# Altium PCB coilcube_v3.PcbDoc
Units mil, origin at the board's own origin, x right, y up, seen from the top; angles counter-clockwise.
Board outline 2225 x 1000 mil, 2 copper layers (Top Layer, Bottom Layer); 69 components, 44 nets, 177 pads, 38 vias.
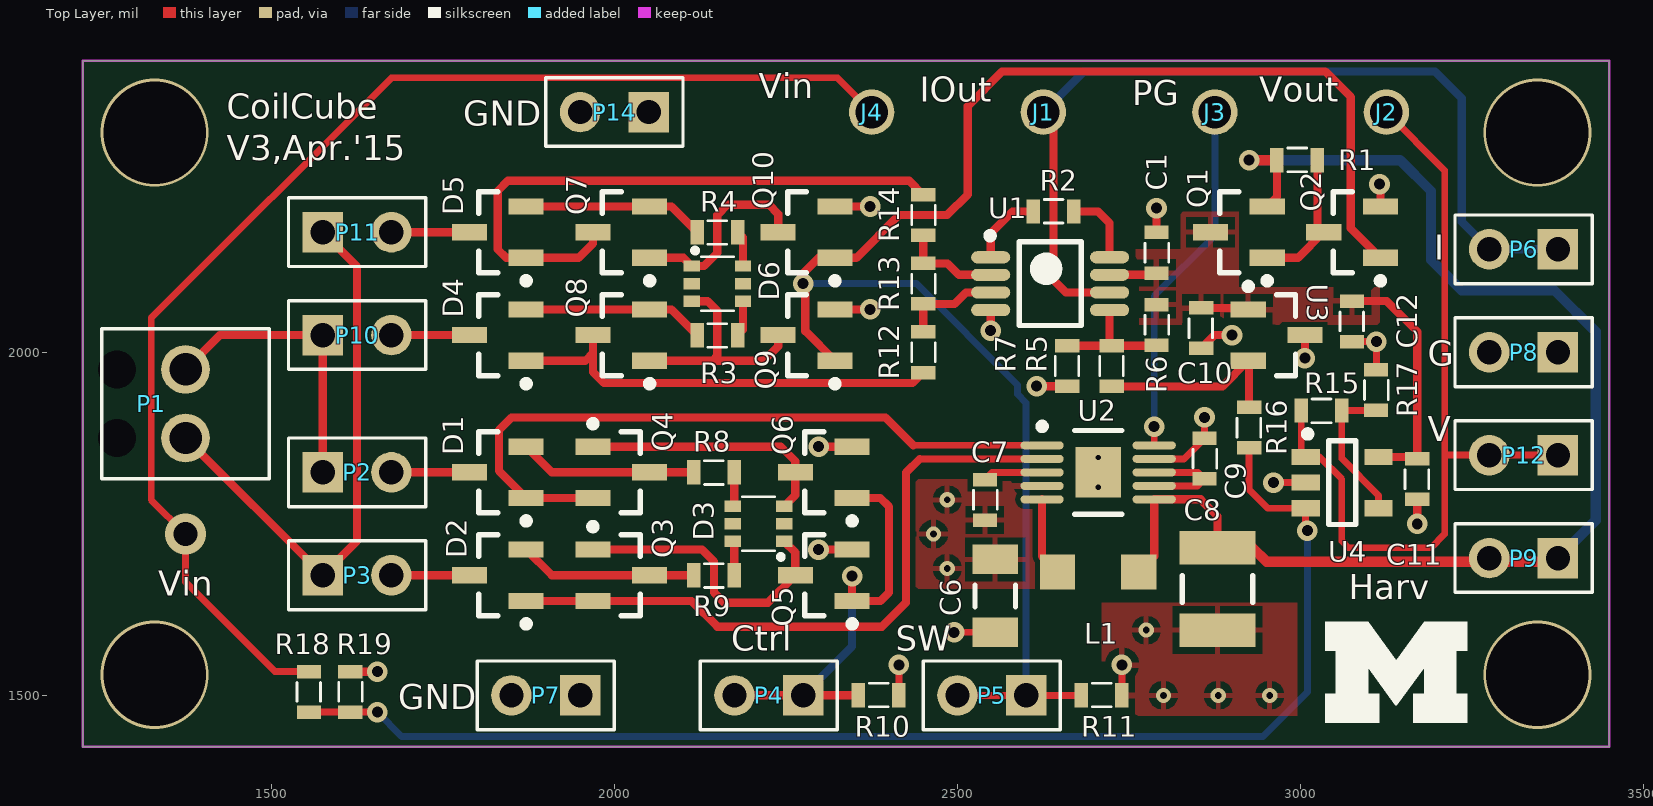
[diagram p0: Top Layer view]
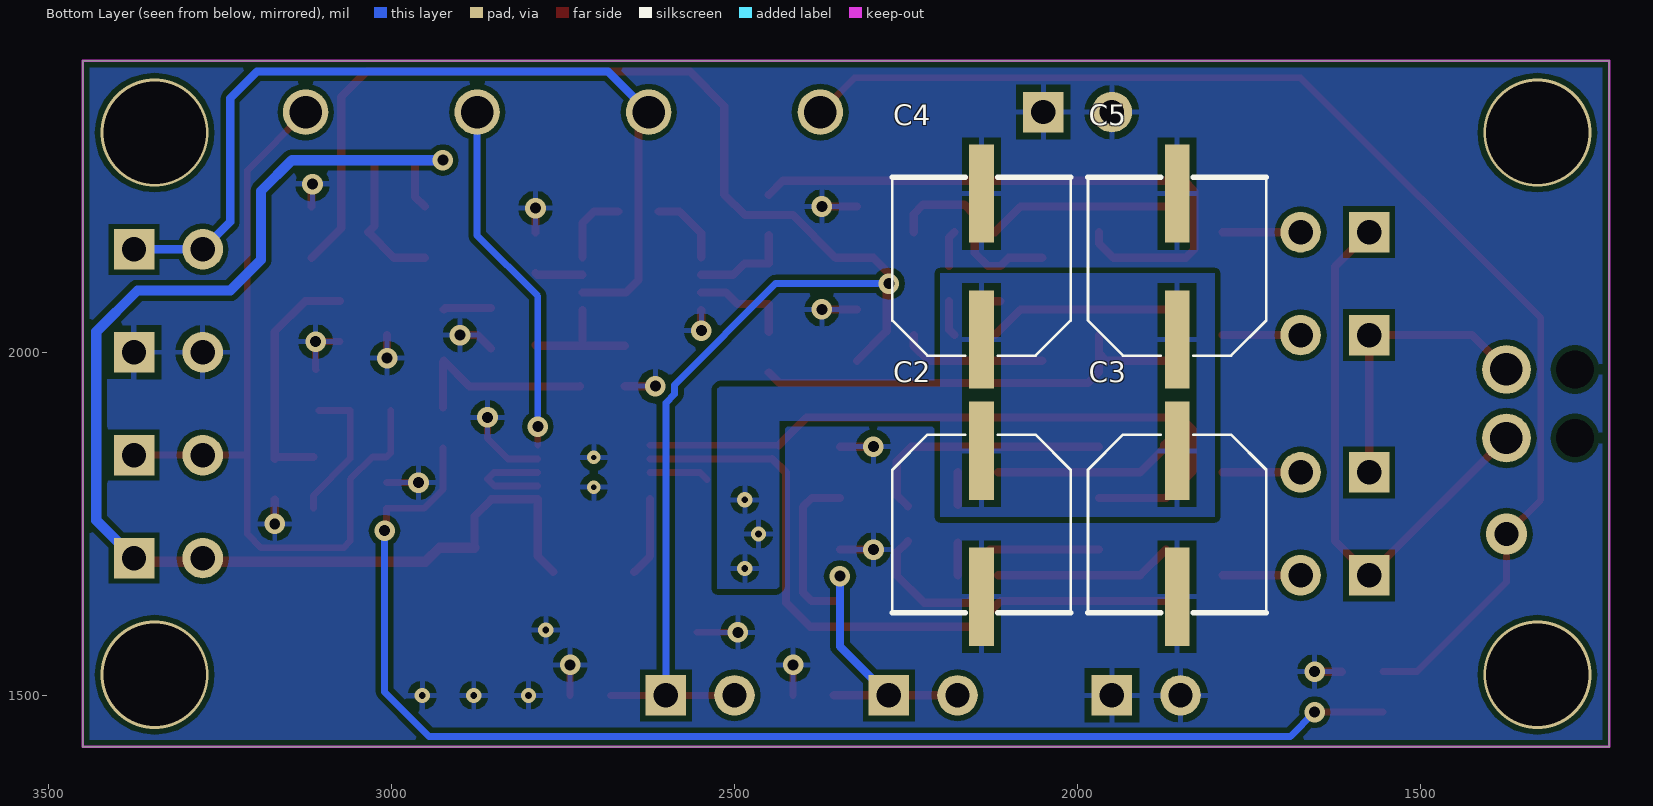
[diagram p1: Bottom Layer view, seen from below]

## Layer stack, top to bottom
Top Solder: solder mask 0.4, Solder Resist, Dk 3.5
Top Layer: signal copper 1.4
Dielectric 1: dielectric 12.6, FR-4, Dk 4.8
Bottom Layer: signal copper 1.4
Bottom Solder: solder mask 0.4, Solder Resist, Dk 3.5

## Board outline
1225,1425 3450,1425 3450,2425 1225,2425

## Design rules (kind name [scope] priority, off if disabled: settings)
Clearance "Clearance~Sunstone Circuits" [All] p1: gap=8 // Sunstone Circuits Minimum Clearance Rule (Double Sided)
HoleSize "HoleSize~Sunstone Circuits" [All] p1: absolutevalues=TRUE maxlimit=251 minlimit=16 maxpercent=80.000 minpercent=20.000 // SSC Hole Size Rule For Single Sided & Double Sided Designs.
HoleSize Testpoint [All] p2: absolutevalues=TRUE maxlimit=100 minlimit=1 maxpercent=80.000 minpercent=20.000
HoleSize TestPointUsage [All] p3: absolutevalues=TRUE maxlimit=100 minlimit=1 maxpercent=80.000 minpercent=20.000
MinimumAnnularRing "MinimumAnnularRing~Sunstone Circuits" [All] p1: minimumring=7 // Sunstone Circuits Minimum Annular Ring (Double Sided)
PlaneClearance "PlaneClearance~Sunstone Circuits" [All] p1: clearance=12 // Sunstone Circuits Power Plane Clearance Rule (Double Sided)
PlaneConnect "PlaneConnect~Sunstone Circuits" [All] p1: planeconnectstyle=Relief reliefexpansion=10 reliefentries=4 reliefconductorwidth=8 reliefairgap=10 // Sunstone Circuits Power Plane Connect Rule (Double Sided)
PolygonConnect "PolygonConnect~Sunstone Circuits" [All] p1: connectstyle=Relief reliefconductorwidth=8 reliefentries=4 polygonreliefangle="90 Angle" airgapwidth=10 // Sunstone Circuits Polygon Connect Style (Double Sided)
RoomDefinition voltage_measurment [InComponentClass('voltage_measurment')] p1 off: confinementstyle=ConfineIn formatcopy=TRUE lockcomponents=FALSE outline 2315.4,2290.1 2315.4,2409.9 3185,2409.9 3185,1912.5 3437.5,1912.5 3437.5,1787.5 3204.61,1787.5 3204.61,1758.74 3147.29,1758.74 3147.29,1728.15 2973.65,1728.15 2973.65,1833.74 2890.39,1833.74 2890.39,2290.1
RoomDefinition harvesting [InComponentClass('harvesting')] p2 off: confinementstyle=ConfineIn formatcopy=TRUE lockcomponents=FALSE outline 1237.44,1803.44 1237.44,2046.56 1711.14,2046.56 1711.14,2315.95 1887.5,2315.95 1887.5,2412.5 2112.5,2412.5 2112.5,2409.9 2935,2409.9 2935,2062.5 3437.5,2062.5 3437.5,1637.5 2954.94,1637.5 2954.94,1549.53 2441.26,1549.53 2441.26,1465.39 2337.5,1465.39 2337.5,1437.5 1787.5,1437.5 1787.5,1559.05 1711.14,1559.05 1711.14,1612.5 1512.5,1612.5 1512.5,1803.44
RoomDefinition current_measurment [InComponentClass('current_measurment')] p3 off: confinementstyle=ConfineIn formatcopy=TRUE lockcomponents=FALSE outline 1512.5,1962.5 1512.5,2237.5 1741.26,2237.5 1741.26,2255.87 2415.39,2255.87 2415.39,2256.26 2565.4,2256.26 2565.4,2409.9 2685,2409.9 2685,2314.61 3051.26,2314.61 3051.26,2255.87 3163.74,2255.87 3163.74,2212.5 3437.5,2212.5 3437.5,2087.5 3163.74,2087.5 3163.74,2084.29 3053.74,2084.29 3053.74,1944.13 2766.26,1944.13 2766.26,1465.39 2662.5,1465.39 2662.5,1437.5 2437.5,1437.5 2437.5,1934.29 1741.26,1934.29 1741.26,1962.5
RoutingVias "RoutingVias~Sunstone Circuits" [All] p1: holewidth=16 width=30 viastyle="Through Hole" minholewidth=16 minwidth=30 maxholewidth=20 maxwidth=40 // Sunstone Circuits Routing Vias Rule (Double Sided)
ShortCircuit "ShortCircuit~Sunstone Circuits" [All] p1: allowed=FALSE // Sunstone Circuits Short Circuit Rule~Do Not Allow (Double Sided)
SolderMaskExpansion TentVias [isVia] p1: expansion=-20 // Sunstone Circuits Solder Mask Expansion Rule (Double Sided)
SolderMaskExpansion "SolderMaskExpansion~Sunstone Circuits" [All] p2: expansion=3 // Sunstone Circuits Solder Mask Expansion Rule (Double Sided)
ViasUnderSMD "ViasUnderSMD~Sunstone Circuits" [All] p1: allowed=FALSE // Sunstone Circuits Vias Under SMD~Do Not Allow (Double Sided)
Width "Width~Sunstone Circuits" [All] p1: maxlimit=100 minlimit=6 preferedwidth=10 // Sunstone Circuits Minimum Width Rule (Double Sided)
26 further rules are at their usual default settings.

## Classes and differential pairs
component class voltage_measurment: C11 C12 J2 J4 P12 R15 R16 R17 R18 R19 U4
component class harvesting: C2 C3 C4 C5 C6 C7 C8 C9 D1 D2 D3 J3 L1 P1 P2 P3 P4 P7 P8 P9 P14 Q3 Q4 Q5 Q6 R8 R9 R10 U2
component class current_measurment: C1 C10 D4 D5 D6 J1 P5 P6 P10 P11 Q1 Q2 Q7 Q8 Q9 Q10 R1 R2 R3 R4 R5 R6 R7 R11 R12 R13 R14 U1 U3

## Components (designator, comment, footprint, x,y, rotation, side; value= is the part's Value field where it differs from the comment)
C1 "Ceramic capacitor" 0603 2790,2145 r90 top
C2 "Aluminum capacitor" KEMET_EDK_9H 2140,1750 r90 bottom
C3 "Aluminum capacitor" KEMET_EDK_9H 1855,1750 r90 bottom
C4 "Aluminum capacitor" KEMET_EDK_9H 2140,2125 r270 bottom
C5 "Aluminum capacitor" KEMET_EDK_9H 1855,2125 r270 bottom
C6 "Ceramic capacitor" 1206 2555,1645 r270 top
C7 "Ceramic capacitor" 0603 2540,1785 r90 top
C8 "Ceramic capacitor" 1210 2875,1655 r90 top
C9 "Ceramic capacitor" 0603 2860,1845 r90 top
C10 "Ceramic capacitor" 0603 2855,2035 r270 top
C11 "Ceramic capacitor" 0603 3170,1815 r270 top
C12 "Ceramic capacitor" 0603 3075,2045 r270 top
D1 "D_BAS40-04" SOT23-3 1830,1825 r180 top
D2 "D_BAS40-04" SOT23-3 1830,1675 r180 top
D3 "BAS40TW" SOT-363 2210,1750 r90 top
D4 "D_BAS40-04" SOT23-3 1830,2025 r180 top
D5 "D_BAS40-04" SOT23-3 1830,2175 r180 top
D6 "BAS40TW" SOT-363 2150,2100 r270 top
J1 "5004" TestPoint 2625,2350 r0 top
J2 "5004" TestPoint 3125,2350 r0 top
J3 "5004" TestPoint 2875,2350 r0 top
J4 "5004" TestPoint 2375,2350 r0 top
L1 "Chip inductor" CDRH2D18 2705,1680 r180 top
P1 "Screw connector" MPT_2position 1375,1925 r270 top
P2 "1 x 2 header" "1x2 header" 1625,1825 r0 top
P3 "1 x 2 header" "1x2 header" 1625,1675 r0 top
P4 "1 x 2 header" "1x2 header" 2225,1500 r180 top
P5 "1 x 2 header" "1x2 header" 2550,1500 r180 top
P6 "1 x 2 header" "1x2 header" 3325,2150 r180 top
P7 "1 x 2 header" "1x2 header" 1900,1500 r180 top
P8 "1 x 2 header" "1x2 header" 3325,2000 r180 top
P9 "1 x 2 header" "1x2 header" 3325,1700 r180 top
P10 "1 x 2 header" "1x2 header" 1625,2025 r0 top
P11 "1 x 2 header" "1x2 header" 1625,2175 r0 top
P12 "1 x 2 header" "1x2 header" 3325,1850 r180 top
P14 "1 x 2 header" "1x2 header" 2000,2350 r180 top
Q1 "Si2309CDS" SOT23-3 2910,2175 r180 top
Q2 "Si2312CDS" SOT23-3 3075,2175 r180 top
Q3 "Si2342DS" SOT23-3 2010,1675 r0 top
Q4 "Si2342DS" SOT23-3 2010,1825 r0 top
Q5 "Si2338DS" SOT23-3 2305,1675 r180 top
Q6 "Si2338DS" SOT23-3 2305,1825 r180 top
Q7 "Si2301CDS" SOT23-3 2010,2175 r180 top
Q8 "Si2301CDS" SOT23-3 2010,2025 r180 top
Q9 "Si2338DS" SOT23-3 2280,2025 r180 top
Q10 "Si2338DS" SOT23-3 2280,2175 r180 top
R1 "Chip resistor" 0603 2995,2280 r180 top
R2 "Chip resistor" 0603 2640,2205 r180 top
R3 "Chip resistor" 0603 2150,2025 r0 top
R4 "Chip resistor" 0603 2150,2175 r0 top
R5 "Chip resistor" 0603 2725,1980 r270 top
R6 "Chip resistor" 0603 2790,2040 r90 top
R7 "Chip resistor" 0603 2660,1980 r270 top
R8 "Chip resistor" 0603 2145,1825 r0 top
R9 "Chip resistor" 0603 2145,1675 r0 top
R10 "Chip resistor" 0603 2385,1500 r180 top
R11 "Chip resistor" 0603 2710,1500 r180 top
R12 "Chip resistor" 0603 2450,2000 r90 top
R13 "Chip resistor" 0603 2450,2100 r90 top
R14 "Chip resistor" 0603 2450,2200 r90 top
R15 "Chip resistor" 0603 3030.47,1915 r0 top
R16 "Chip resistor" 0603 2925,1890 r270 top
R17 "Chip resistor" 0603 3110,1945 r90 top
R18 "Chip resistor" 0603 1555,1505 r270 top
R19 "Chip resistor" 0603 1615,1505 r90 top
U1 "INA333" MSOP-8 2635,2100 r0 top
U2 "LTC3588-1" TSSOP50P490X110_HS-11N 2705,1825 r0 top
U3 "ISL21080" SOT23-3 2965,2025 r0 top
U4 "MCP6031" SOT23-5 3060.47,1810 r0 top

## Footprints (in the part's own frame and the unit in brackets; to place one, negate y for a bottom-side part, rotate by r counter-clockwise, add the part's x,y. Pads: shape width x height; smd on the part's side, far side on the other; paste and mask are expansions set on the pad)
"1x2 header" [mm] "1x2 header, 100 mils"
  rect 1.5x1.5 hole 0.9: 1(-1.27,0)
  round 1.5 hole 0.9: 2(1.27,0)
  silkscreen extent -2.54,-1.27 2.54,1.27, body extent -2.53,-1.26 2.53,1.26, height 8.38
0603 [mm] "2-Leads, Body 1.55x0.85mm, IPC Medium Density"
  rect 0.5x0.9 smd: 1(-0.75,0) 2(0.75,0)
  silkscreen extent -0.35,-0.45 0.35,0.43, body extent -0.75,-0.42 0.75,0.43, height 0.5
1206 [mm]
  rect 1.1x1.7 smd: 1(-1.35,0) 2(1.35,0)
  silkscreen extent -0.4,-0.75 0.4,0.75, body extent -1.7,-0.9 1.7,0.9, height 1.3
1210 [mm]
  rect 1.25x2.8 smd: 1(1.525,-0.102) 2(-1.525,-0.102)
  silkscreen extent -0.5,-1.4 0.5,1.2, body extent -1.8,-1.5 1.8,1.3, height 2.8
CDRH2D18 [mm] "Sumdia SMD power inductor"
  rect 1.3x1.3 smd: 1(-1.5,0) 2(1.5,0)
  body extent -1.5,-1.7 1.5,1.8, height 2
KEMET_EDK_9H [mm] "Kemet surface mount aluminum capacitor EDK series 9H"
  rect 3.64x0.91 smd: 1(2.7,0) 2(-2.7,0)
  silkscreen extent -3.3,-3.3 3.3,3.3, body extent -3.3,-3.3 3.3,3.3, height 8.7
MPT_2position [mm] "Screw connector 2 pos"
  round 1.8 hole 1.2: 1(-1.27,0) 2(1.27,0)
  round 0 hole 1.4: ""(-1.27,-2.54) ""(1.27,-2.54)
  silkscreen extent -2.77,-3.1 2.77,3.1
MSOP-8 [mm] "TSOP, 8-Leads, Body 3.00x3.00mm, Pitch 0.65mm, IPC Medium Density"
  oval 1.45x0.45 smd: 1(-2.2,0.975) 2(-2.2,0.325) 3(-2.2,-0.325) 4(-2.2,-0.975) 5(2.2,-0.975) 6(2.2,-0.325) 7(2.2,0.325) 8(2.2,0.975)
  silkscreen extent -2.35,-1.55 1.15,1.9, body extent -1.55,-1.55 1.55,1.55, height 1.1
SOT23-3 [mm] "SOT23, 3-Leads, Body 2.9x1.3mm, Pitch 0.95mm, Lead Span 2.3mm, IPC Medium Density"
  rect 1.3x0.6 smd: 1(-1.05,0.95) 2(-1.05,-0.95) 3(1.05,0)
  silkscreen extent -1.18,-1.5 0.7,1.92, body extent -0.7,-1.5 0.7,1.5, height 1.2
SOT23-5 [mm] "SOT23, 5-Leads, Body 2.90x2.45mm, Pitch 0.95mm, IPC Medium Density"
  rect 1.05x0.6 smd: 1(-1.35,0.95) 2(-1.35,0) 3(-1.35,-0.95) 4(1.35,-0.95) 5(1.35,0.95)
  silkscreen extent -1.4,-1.55 0.5,1.92, body extent -0.88,-1.52 0.87,1.53, height 1.45
SOT-363 [mm]
  rect 0.42x0.6 smd: 1(-0.65,-0.95) 2(0,-0.95) 3(0.65,-0.95) 4(0.65,0.95) 5(0,0.95) 6(-0.65,0.95)
  silkscreen extent -1.28,-0.88 1,0.6, body extent -1,-0.6 1,0.6, height 1
TestPoint [mm]
  round 1.68 hole 1.2: 1(0,0)
  body extent -1.26,-1.27 1.27,1.27, height 4.57
TSSOP50P490X110_HS-11N [mm] "TSSOP, 10-Leads, Body 3.00x3.00mm, Pitch 0.50mm, Thermal Pad 1.88.2x1.68.2mm, IPC Medium Density"
  oval 1.6x0.3 smd: 1(-2.075,1) 2(-2.075,0.5) 3(-2.075,0) 4(-2.075,-0.5) 5(-2.075,-1) 6(2.075,-1) 7(2.075,-0.5) 8(2.075,0) 9(2.075,0.5) 10(2.075,1)
  rect 1.68x1.88 smd: 11(0,0)
  silkscreen extent -2.2,-1.55 0.87,1.82, body extent -1.55,-1.55 1.55,1.55, height 1.1

## Part data
C1 C10 C11: library part C_0.1u_25V_0603_ceramic, "Ceramic capacitor, 0.1 uF, 0603 package"
C2 C3 C4 C5: library part C_100u_35V_aluminum, "Aluminum capacitor, 100 uF, 35 V, KEMET EDK 9H"
C6: library part C_22u_35V_1206_ceramic, "Ceramic capacitor, 22 uF, 35 V, 1206 package"
C7: library part C_1u_16V_0603_ceramic, "Ceramic capacitor, 1 uF, 16 V, 0603 package"
C8: library part C_100u_10V_1210_ceramic, "Ceramic capacitor, 100u, 1210 package"
C9: library part C_4.7u_10V_0603_ceramic, "Ceramic capacitor, 4.7u, 10V, 0603 package"
C12: library part C_10u_6.3V_0603_ceramic, "Ceramic capacitor, 10 uF, 0603 package"
D1 D2 D4 D5: "SURFACE MOUNT SCHOTTKY BARRIER DIODE"
D3 D6: library part D_BAS40TW, "SURFACE MOUNT SCHOTTKY BARRIER DIODE ARRAYS"
J1 J2 J3 J4: library part TestPoint, "TEST POINT PC MINI .040\"D YELLOW"
L1: library part L_10uH_1A_180m, "Chip inductor, 10 uH,  1A, 180 mOhm"
P1: library part MPT_2POS, "Screw connector 2 positions"
P2 P3 P4 P5 P6 P7 P8 P9 P10 P11 P12 P14: "100 mils standard header"
Q1: "P-Channel 60-V (D-S) MOSFET"
Q2: "N-Channel 20 V (D-S) MOSFET"
Q3 Q4: "N-Channel 8 V (D-S) MOSFET"
Q5 Q6 Q9 Q10: "N-Channel 30 V (D-S) MOSFET"
Q7 Q8: "P-Channel 20 V (D-S) MOSFET"
R1 R8 R9 R10 R11: library part R_1M_0603, "Chip resistor, 1 Meg, 0603 package"
R2 R12 R13 R14 R15 R16 R17 R18 R19: library part R_100K_0603, "Chip resistor, 100K, 0603 package"
R3 R4: library part R_47K_0603, "Chip resistor, 47K, 0603 package"
R5: library part R_0_0603, "Chip resistor, 0, 0603 package"
R6: library part R_150K_0603, "Chip resistor, 150K, 0603 package"
R7: library part R_300K_0603, "Chip resistor, 300K, 0603 package"
U1: "Micro-Power (50µA), Zerø-Drift, Rail-to-Rail Out  Instrumentation Amplifier"
U2: "Piezoelectric Energy   Harvesting Power Supply"
U3: "300nA NanoPower Voltage References"
U4: "0.9 µA, High Precision Op Amps"

## Via types
v1: diameter 30, hole 16, Top Layer to Bottom Layer, 24 vias
v2: diameter 22, hole 10, Top Layer to Bottom Layer, 7 vias
v3: diameter 157.48, hole 149.61, Top Layer to Bottom Layer, 4 vias
v4: diameter 19.68, hole 7.87, Top Layer to Bottom Layer, 2 vias
v5: diameter 60, hole 35, Top Layer to Bottom Layer, 1 vias

## Nets (pads, with @x,y where several pads share a name; then routed paths per layer and width w, separated by ;. In a path a pad name is that pad's centre, name@x,y a point inside that pad or via, vN(x,y) a via of type N, cw(c..) or ccw(c..) an arc to the next point about the centre after c; other vN are vias at no path point)
CONTROL: P4.1 P4.2 Q5.1 Q6.1 R10.2 | length 662.4
  Top Layer w12: P4.2 P4.1 R10.2 ; v1(2346.34,1673.66) Q5.1 2387.6,1637.6 2400,1650 2400,1775 2387.4,1787.6 Q6.1
  Bottom Layer w12: P4.1 2346.34,1571.34 v1(2346.34,1673.66)
CURRENT_WAVEFORM: J1.1 P6.1 P6.2 U1.6 | length 1327.4
  Top Layer w12: J1.1 2640,2335 2640,2105 2657.8,2087.2 U1.6
  Bottom Layer w12: J1.1 2684.03,2409.03 3195.97,2409.03 3235,2370 3235,2190 P6.2 P6.1
GND: C1.2 C2.2 C3.2 C4.2 C5.2 C6.2 C8.2 C9.2 C10.2 C11.2 C12.2 P7.1 P7.2 P8.1 P8.2 P14.1 P14.2 Q2.2 Q5.2 Q6.2 Q9.2 Q10.2 R7.2 R10.1 R11.1 R17.2 R19.2 U1.4 U2.9 U2.11 U3.3 U4.2 | length 893.8
  Top Layer w10: R10.1 v1(2414.53,1544.53) ; v1(2495,1591.85) C6.2 ; R11.1 v1(2739.53,1544.53) ; U2.9 2830.16,1844.69 C9.2 v1(2860,1905) ; v1(2960.47,1810) U4.2 ; C12.2 v1(3110.47,2015.47) 3110.47,1975 R17.2
  Top Layer w12: R19.2 v1(1654.53,1534.53) ; v1(2297.4,1712.4) Q5.2 ; v1(2297.6,1862.4) Q6.2 ; Q9.2 v1(2372.6,2062.4) ; Q10.2 v1(2372.6,2212.4) ; v1(2548.39,2031.61) U1.4 ; v1(2615.47,1950.47) R7.2 ; C1.2 v1(2790,2210) ; C10.2 2874.53,2025 v1(2900,2025) ; v1(3006.34,1991.34) U3.3 ; v1(3115,2245) 3116.34,2243.66 Q2.2 ; v1(3170,1750) C11.2
  other v2: 2800,1500 2880,1500 2955,1500 2775,1595
  other v4: 2705,1803.35 2705,1846.65
HARVEST_GATED: C1.1 C10.1 C11.1 C12.1 Q1.3 R6.2 U1.7 U3.1 U4.5 | length 492.9
  Top Layer w12: U1.7 2787.32,2112.8 C1.1 ; C10.1 2921.54,2064.53 U3.1 ; C12.1 3125.47,2074.53 3170,2030 C11.1 ; U4.5 C11.1@3168.54,1847.4
IN+: R12.2 R13.1 U1.3 | length 146.3
  Top Layer w12: R12.2 R13.1 2495.47,2070.47 2512.2,2087.2 U1.3
IN-: R13.2 R14.1 U1.2 | length 146.3
  Top Layer w12: R14.1 R13.2 2485.47,2129.53 2502.2,2112.8 U1.2
NetC7_2: C7.2 U2.3 | length 87.6
  Top Layer w10: C7.2 2550.47,1825 U2.3
NetC9_1: C9.1 U2.7 U2.8 | length 154.8
  Top Layer w10: U2.7 2849.84,1805.32 C9.1 2850.47,1825 U2.8
NetD1_1: D1.1 Q4.2 U2.1 | length 1028.8
  Top Layer w10: 2435.41,1864.59 2435.63,1864.37 U2.1
  Top Layer w12: Q4.2 D1.1 1831.75,1827.19 1831.75,1886.75 1850,1905 2395,1905 2435.41,1864.59
NetD1_2: D1.2 Q4.3 R8.1 | length 263.2
  Top Layer w12: D1.2 1908.74,1825 Q4.3 R8.1 ; D1.2@1871.34,1867.4 D1.2@1873.84,1864.9
NetD1_3: D1.3 P2.2 | length 113.7
  Top Layer w12: P2.2 D1.3
NetD2_1: D2.1 Q3.2 U2.2 | length 980
  Top Layer w10: 2445,1844.59 2500,1844.59 2500.09,1844.69 U2.2
  Top Layer w12: D2.1 Q3.2 2112.4,1637.6 2150,1600 2390,1600 2425,1635 2425,1824.59 2445,1844.59
NetD2_2: D2.2 Q3.3 R9.1 | length 259.6
  Top Layer w12: D2.2 1908.74,1675 Q3.3 R9.1
NetD2_3: D2.3 P3.2 | length 113.7
  Top Layer w12: P3.2 D2.3
NetD3_1: D3.1 Q3.1 Q5.3 | length 426.1
  Top Layer w12: Q3.1 2127.6,1712.4 2145,1695 2145,1650 2160,1635 2223.66,1635 Q5.3 2263.66,1708.15 D3.1
NetD3_3: D3.3 Q4.1 Q6.3 | length 376.1
  Top Layer w12: Q4.1 2242.4,1862.4 2263.66,1841.14 Q6.3 2263.66,1791.85 D3.3
NetD3_4: D3.4 R8.2 | length 47.5
  Top Layer w12: D3.4@2174.53,1777.52 R8.2
NetD3_6: D3.6 R9.2 | length 47.5
  Top Layer w12: R9.2 D3.6@2174.53,1722.48
NetD4_1: D4.1 Q8.3 R12.1 | length 650.1
  Top Layer w12: D4.1 1957.6,1987.6 1968.66,1998.66 ; Q8.3 1968.66,1998.66 ; R12.1 2434.53,1955 1985,1955 1968.66,1971.34 1968.66,1998.66
NetD4_2: D4.2 Q8.2 R3.1 | length 264.6
  Top Layer w12: D4.2 Q8.2 2083.07,2062.4 R3.1
NetD4_3: D4.3 P10.2 | length 113.7
  Top Layer w12: P10.2 D4.3
NetD5_1: D5.1 Q7.3 R14.2 | length 888.6
  Top Layer w12: Q7.3 1968.66,2158.66 1947.6,2137.6 D5.1 1842.4,2137.6 1830,2150 1830,2235 1845,2250 2429.53,2250 R14.2
NetD5_2: D5.2 Q7.2 R4.1 | length 264.6
  Top Layer w12: D5.2 Q7.2 2083.07,2212.4 R4.1
NetD5_3: D5.3 P11.2 | length 113.7
  Top Layer w12: P11.2 D5.3
NetD6_1: D6.1 Q7.1 Q10.3 | length 293.5
  Top Layer w12: Q7.1 2100.59,2137.6 D6.1 2130.59,2125.59 2150,2145 2150,2200 2165,2215 2225,2215 2238.66,2201.34 Q10.3
NetD6_3: D6.3 Q8.1 Q9.3 | length 331.2
  Top Layer w12: Q8.1 2142.6,1987.6 ; D6.3 2135.59,2074.41 2150,2060 2150,1995 2142.6,1987.6 ; Q9.3 2238.66,2008.66 2217.6,1987.6 2142.6,1987.6
NetD6_4: D6.4 R3.2 | length 52.7
  Top Layer w12: R3.2 2187.4,2032.87 D6.4
NetD6_6: D6.6 R4.2 | length 52.7
  Top Layer w12: R4.2 2187.4,2167.13 D6.6
NetJ4_1: J4.1 R18.1 | length 1855.2
  Top Layer w10: R18.1@1555,1535 1505,1535 1375,1665 v5(1375,1735) 1325,1785 1325,2050 1675,2400 2325,2400 J4.1
NetL1_2: L1.2 U2.5 | length 115
  Top Layer w12: U2.5 2623.31,1702.64 L1.2
NetP1_1: P1.1 P2.1 P10.1 | length 420.7
  Top Layer w12: P1.1 1425,2025 P10.1 P2.1
NetP1_2: P1.2 P3.1 P11.1 | length 824.3
  Top Layer w12: P1.2 P3.1 1625,1725 1625,2125 P11.1
NetQ1_1: Q1.1 Q2.3 R1.1 | length 206.6
  Top Layer w12: Q1.1 2996.26,2137.6 Q2.3 3024.53,2184.13 R1.1
NetR2_1: R2.1 U1.8 | length 109
  Top Layer w12: R2.1 2705,2205 2721.61,2188.39 U1.8
NetR2_2: R2.2 U1.1 | length 110.2
  Top Layer w12: U1.1 2548.39,2173.39 2580,2205 R2.2
NetR5_1: R5.1 R6.1 R7.1 U1.5 | length 179.1
  Top Layer w12: R7.1 R5.1 2789.06,2009.53 R6.1 ; R5.1@2721.61,2012.91 U1.5
NetR15_2: R15.2 R17.1 U4.4 | length 210.6
  Top Layer w10: R17.1@3105.94,1915 R15.2 3060,1845 3113.62,1791.38 U4.4
NetR16_2: R16.2 R18.2 R19.1 U4.3 | length 1919.5
  Top Layer w10: R18.2 v1(1654.53,1475.47) ; R16.2 2925,1800 2952.4,1772.6 U4.3 3007.32,1742.68 v1(3010,1740)
  Bottom Layer w10: v1(1654.53,1475.47) 1690,1440 2945,1440 3010,1505 v1(3010,1740)
PGOOD: J3.1 U2.10 | length 522.2
  Top Layer w10: U2.10 v1(2786.69,1891.69)
  Bottom Layer w10: v1(2786.69,1891.69) 2786.69,2081.69 2875,2170 J3.1
SW: P5.1 P5.2 Q2.1 Q9.1 Q10.1 R11.2 | length 2421.4
  Top Layer w10: P5.2 P5.1 R11.2
  Top Layer w12: Q9.1 2278.25,2030.68 2278.25,2096.75 v1(2275,2100) 2275,2115 2297.6,2137.6 Q10.1 2352.6,2137.6 2415,2200 2485,2200 2515,2230 2515,2359.03 2565,2409.03 3035.97,2409.03 3073.25,2371.75 3073.25,2180.68 Q2.1
  Bottom Layer w10: v1(2275,2100) 2440,2100 2587.47,1952.53 2587.47,1938.87 2600,1926.35 P5.1
V_HARVEST: C8.1 L1.1 P9.1 P9.2 Q1.2 R1.2 U2.6 | length 1904.1
  Top Layer w12: L1.1 2786.69,1702.64 U2.6 2854.37,1785.63 2879,1761 C8.1 ; Q1.2 2965.47,2226.54 R1.2
  Top Layer w15: C8.1 2929.96,1715.04 2950.5,1694.5 3369.5,1694.5 P9.1 ; v1(2925,2280) R1.2
  Bottom Layer w15: v1(2925,2280) 3145,2280 3190,2235 3190,2135 3235,2090 3370,2090 3430,2030 3430,1755 P9.1
VCAP: C2.1 C3.1 C4.1 C5.1 C6.1 C7.1 U2.4
  other v2: 2485,1685 2465,1735 2485,1785
VOLTAGE_WAVEFORM: J2.1 P12.1 P12.2 R15.1 U4.1 | length 1204
  Top Layer w10: R15.1 3000.94,1853.78 U4.1 3027.6,1847.4 3060,1815 3060,1725 3070,1715 3190,1715 3210,1735 3210,1850 ; J2.1 3210,2265 3210,1850 ; P12.1 P12.2 3210,1850
VREF_1.5: R5.2 R16.1 U3.2 | length 283.1
  Top Layer w12: R5.2 2725.47,1950 2886.06,1950 U3.2 2925,1986.26 R16.1
pads on no net: D3.2 D3.5 D6.2 D6.5 P1.
copper on no net:
  other v3: 1330,1530 3345,1530 1330,2320 3345,2320

## Polygon pours and split planes (outlines as drawn)
GND on Top Layer "Top Layer-No Net" (solid, pour order 10): 2710,1635 2710,1470 2995,1470 2995,1635
HARVEST_GATED on Top Layer "Top Layer-No Net" (solid, pour order 4): 2675,2125 2760,2125 2760,2150 2825,2150 2825,2205 2910,2205 2910,2095 3115,2095 3115,2040 2765,2040 2765,2100 2765,2105 2675,2105
VCAP on Top Layer "Top Layer-No Net" (solid, pour order 2): 2435,1655 2435,1815 2640,1815 2640,1655
GND on Bottom Layer "Top Layer-No Net" (solid, pour order 8): 1225,1425 1225,2425 2145,2425 3450,2425 3450,1425
VCAP on Bottom Layer "Top Layer-No Net" (solid, pour order 6): 1800,2115 1800,1760 2170,1760 2200,1760 2200,1900 2435,1900 2435,1655 2525,1655 2525,1950 2200,1950 2200,2115

## Keep-outs
Keep-Out Layer:
  the board outline again, w3.94

## Silkscreen, mask and mechanical layers (free items; w line width, h text height)
Top Overlay:
  region: 3036.04,1460.02 3114.69,1460.02 3114.69,1502.01 3098.69,1502.01 3098.69,1540 3137.68,1485.35 3140.35,1485.35 3180,1540 3180,1502.01 3164,1502.01 3164,1460.02 3242.65,1460.02 3242.65,1502.01 3226.65,1502.01 3226.65,1565.33 3242.65,1565.33 3242.65,1607.31 3180.33,1607.31 3140.35,1552 3138.35,1552 3098.36,1607.31 3036.04,1607.31 3036.04,1565.33 3051.37,1565.33 3051.37,1502.01 3036.04,1502.01
  text "Vin" at 2210,2370 h36
  text "IOut" at 2445,2365 h36
  text "Vout" at 2940,2365 h36
  text "PG" at 2755,2360 h36
  text "CoilCube" at 1435,2340 h36
  text "GND" at 1780,2330 h36
  text "V3,Apr.'15" at 1435,2280 h36
  text "I" at 3195,2135 h36
  text "G" at 3185,1980 h36
  text "V" at 3185,1870 h36
  text "Vin" at 1335,1645 h36
  text "Harv" at 3070,1640 h36
  text "Ctrl" at 2170,1565 h36
  text "SW" at 2410,1565 h36
  text "GND" at 1685,1480 h36